# Altium PCB NEpic.PcbDoc (part 2 of 5)
Units mil, origin at the board's own origin, x right, y up, seen from the top; angles counter-clockwise.
Board outline 1660 x 1990 mil, 4 copper layers (Top Layer, GND, VCC, Bottom Layer); 30 components, 61 nets, 194 pads, 84 vias.
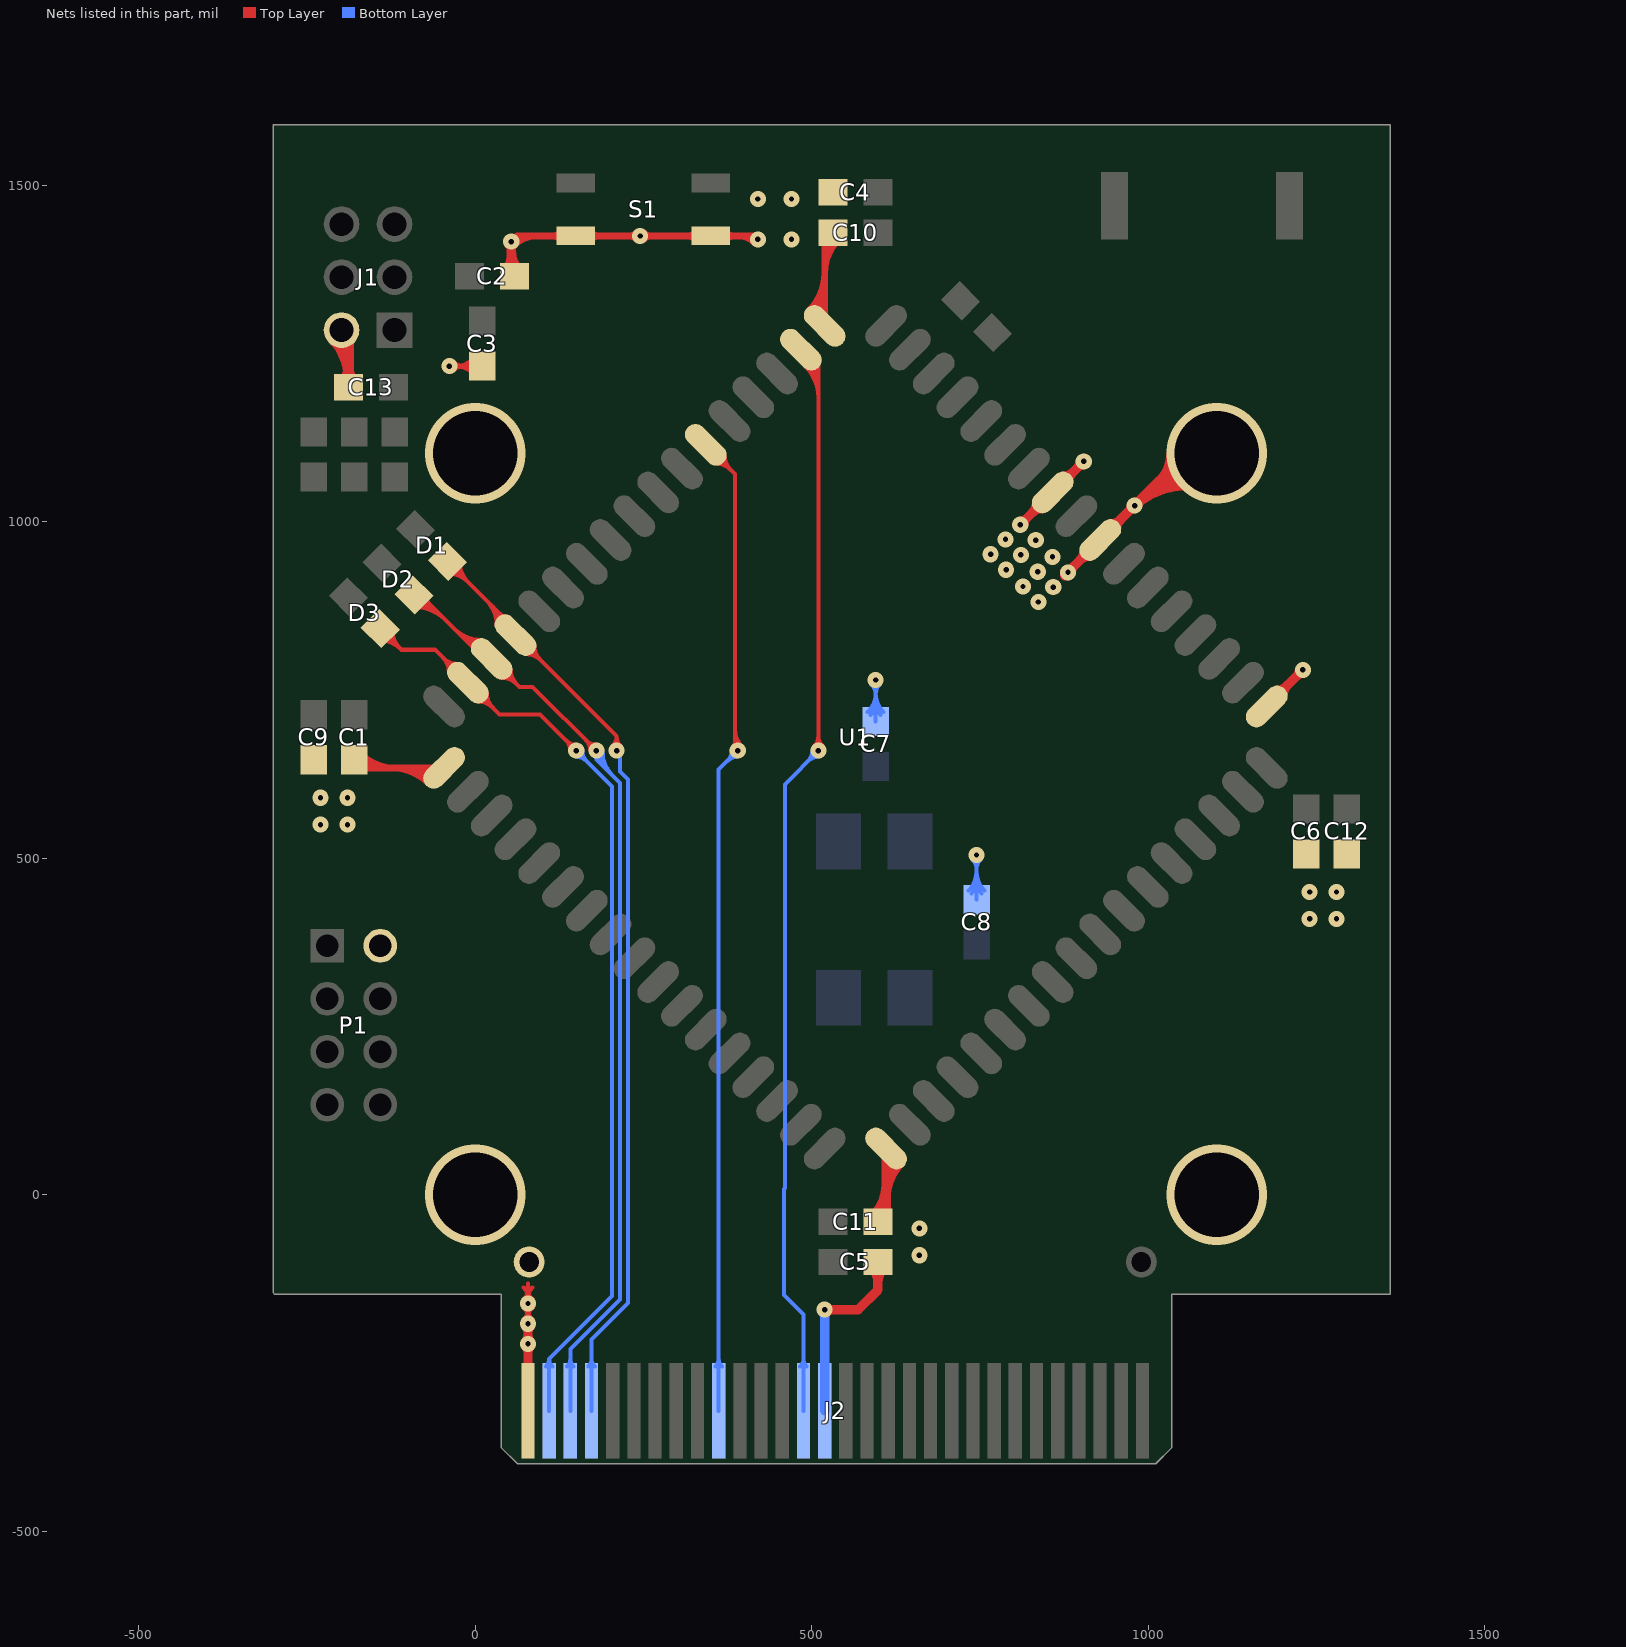
[diagram p4: the nets of this part, all layers, seen from the top]

## Via types
v1: diameter 24, hole 8, Top Layer to Bottom Layer, tented both sides, 78 vias
v2: diameter 150, hole 126, Top Layer to Bottom Layer, 4 vias
v3: diameter 40, hole 20, Top Layer to Bottom Layer, tented both sides, 2 vias

## Nets (pads, with @x,y where several pads share a name; then routed paths per layer and width w, separated by ;. In a path a pad name is that pad's centre, name@x,y a point inside that pad or via, vN(x,y) a via of type N, cw(c..) or ccw(c..) an arc to the next point about the centre after c; other vN are vias at no path point) (continued)
GND: C1.1 C2.1 C3.1 C4.1 C5.1 C6.1 C7.1 C8.1 C9.1 C10.1 C11.1 C12.1 C13.1 J1.2 J2.31 J2.60 P1.2 pad.0@80,-100 S1.1 S1.3 U1.1 U1.18 U1.35 U1.42 U1.44 U1.52 | length 10485.5
  Top Layer w6: v1(-38.46,1231.54) C3.1@10,1231.54 ; v1@51.34,1418.66 cw(c66.66,1403.34) 66.66,1425 ; v1(53.46,1416.54) v1@61.93,1425 ; v1@55.59,1414.41 cw(c81.14,1388.86) 81.14,1425 ; v1@59.83,1410.17 cw(c95.63,1374.37) 95.63,1425 ; 71.94,-138.06 cw(c56.58,-153.42) 78.31,-153.42 cw(c100.03,-153.42) 84.67,-138.06 ; v1(78.31,-191.69) v1(78.31,-161.69) 78.31,-131.69 ; S1.1@126.83,1417.38 ccw(c108.42,1398.98) 108.42,1425 ccw(c108.42,1451.02) S1.1@126.83,1432.62 ; S1.1@171.6,1417.38 cw(c190,1398.98) 190,1425 cw(c190,1451.02) S1.1@171.6,1432.62 ; v1@238.64,1418.64 ccw(c223.27,1403.27) 223.27,1425 ccw(c223.27,1446.73) v1@238.64,1431.36 ; v1@251.36,1418.64 cw(c266.73,1403.27) 266.73,1425 cw(c266.73,1446.73) v1@251.36,1431.36 ; S1.3@327.61,1417.38 ccw(c309.21,1398.98) 309.21,1425 ccw(c309.21,1451.02) S1.3@327.61,1432.62 ; S1.3@372.39,1417.38 cw(c390.79,1398.98) 390.79,1425 cw(c390.79,1451.02) S1.3@372.39,1432.62 ; 386.2,1425 cw(c386.2,1386.2) v1@413.64,1413.64 ; 400.69,1425 cw(c400.69,1400.69) v1@417.88,1417.88 ; U1.35@1176.34,725.66 U1.35@1176.34,726.34 ; v1@-32.1,1225.17 cw(c-16.74,1209.81) -16.74,1231.54 ; v1@-32.1,1225.17 cw(c-16.74,1209.81) -16.74,1231.54 ; v1@-32.1,1225.17 cw(c-16.74,1209.81) -16.74,1231.54 ; v1@-32.1,1237.9 ccw(c-16.74,1253.26) -16.74,1231.54 ; v1@-32.1,1237.9 ccw(c-16.74,1253.26) -16.74,1231.54 ; v1@-32.1,1237.9 ccw(c-16.74,1253.26) -16.74,1231.54 ; v1@-30.28,1231.54 cw(c-30.28,1191.25) C3.1@-1.8,1219.74 ; v1@-30.28,1231.54 ccw(c-30.28,1271.82) C3.1@-1.8,1243.33 ; v1@-30.28,1231.54 cw(c-30.28,1191.25) C3.1@-1.8,1219.74 ; v1@-30.28,1231.54 ccw(c-30.28,1271.82) C3.1@-1.8,1243.33 ; v1@-30.28,1231.54 ccw(c-30.28,1271.82) C3.1@-1.8,1243.33 ; v1@-30.28,1231.54 cw(c-30.28,1191.25) C3.1@-1.8,1219.74 ; -15.8,1231.54 cw(c-15.8,1205.74) C3.1@2.44,1223.98 ; -15.8,1231.54 ccw(c-15.8,1257.33) C3.1@2.44,1239.09 ; -15.8,1231.54 cw(c-15.8,1205.74) C3.1@2.44,1223.98 ; -15.8,1231.54 ccw(c-15.8,1257.33) C3.1@2.44,1239.09 ; -15.8,1231.54 ccw(c-15.8,1257.33) C3.1@2.44,1239.09 ; -15.8,1231.54 cw(c-15.8,1205.74) C3.1@2.44,1223.98 ; v1@71.94,-185.33 ccw(c56.58,-169.97) v1@78.31,-169.97 ; v1@71.94,-185.33 ccw(c56.58,-169.97) v1@78.31,-169.97 ; v1@71.94,-185.33 ccw(c56.58,-169.97) v1@78.31,-169.97 ; v1@71.94,-185.33 ccw(c56.58,-169.97) v1@78.31,-169.97 ; v1@71.94,-168.06 cw(c56.58,-183.42) v1@78.31,-183.42 ; v1@71.94,-168.06 cw(c56.58,-183.42) v1@78.31,-183.42 ; v1@71.94,-168.06 cw(c56.58,-183.42) v1@78.31,-183.42 ; v1@71.94,-168.06 cw(c56.58,-183.42) v1@78.31,-183.42 ; v1@71.94,-155.33 ccw(c56.58,-139.97) 78.31,-139.97 ; v1@71.94,-155.33 ccw(c56.58,-139.97) 78.31,-139.97 ; v1@71.94,-155.33 ccw(c56.58,-139.97) 78.31,-139.97 ; v1@71.94,-155.33 ccw(c56.58,-139.97) 78.31,-139.97 ; v1@78.31,-183.42 cw(c100.03,-183.42) v1@84.67,-168.06 ; v1@78.31,-183.42 cw(c100.03,-183.42) v1@84.67,-168.06 ; v1@78.31,-183.42 cw(c100.03,-183.42) v1@84.67,-168.06 ; v1@78.31,-183.42 cw(c100.03,-183.42) v1@84.67,-168.06 ; v1@78.31,-169.97 ccw(c100.03,-169.97) v1@84.67,-185.33 ; v1@78.31,-169.97 ccw(c100.03,-169.97) v1@84.67,-185.33 ; v1@78.31,-169.97 ccw(c100.03,-169.97) v1@84.67,-185.33 ; v1@78.31,-169.97 ccw(c100.03,-169.97) v1@84.67,-185.33 ; 78.31,-139.97 ccw(c100.03,-139.97) v1@84.67,-155.33 ; 78.31,-139.97 ccw(c100.03,-139.97) v1@84.67,-155.33 ; 78.31,-139.97 ccw(c100.03,-139.97) v1@84.67,-155.33 ; 78.31,-139.97 ccw(c100.03,-139.97) v1@84.67,-155.33
  Top Layer w10: C1.1@-167.81,634.34 U1.1@-46.34,634.34 ; v1@61.93,1425 S1.1@149.21,1425 v1(245,1425) S1.3@350,1425 v1@415,1425 ; U1.52@519.34,1291.34 C10.1@519.34,1417.81 ; C1.1@-176.69,647.88 ccw(c-144.01,680.56) -144.01,634.34 ; C1.1@-176.69,647.88 ccw(c-144.01,680.56) -144.01,634.34 ; C1.1@-176.69,647.88 ccw(c-144.01,680.56) -144.01,634.34 ; C1.1@-176.69,647.88 ccw(c-144.01,680.56) -144.01,634.34 ; C1.1@-169.62,654.95 ccw(c-119.87,704.7) -119.87,634.34 ; C1.1@-169.62,654.95 ccw(c-119.87,704.7) -119.87,634.34 ; C1.1@-169.62,654.95 ccw(c-119.87,704.7) -119.87,634.34 ; C1.1@-169.62,654.95 ccw(c-119.87,704.7) -119.87,634.34 ; -124.57,634.34 cw(c-124.57,556.12) U1.1@-69.25,611.43 ; -124.57,634.34 cw(c-124.57,556.12) U1.1@-69.25,611.43 ; -124.57,634.34 cw(c-124.57,556.12) U1.1@-69.25,611.43 ; -124.57,634.34 cw(c-124.57,556.12) U1.1@-69.25,611.43 ; -100.42,634.34 cw(c-100.42,580.26) U1.1@-62.18,618.5 ; -100.42,634.34 cw(c-100.42,580.26) U1.1@-62.18,618.5 ; -100.42,634.34 cw(c-100.42,580.26) U1.1@-62.18,618.5 ; -100.42,634.34 cw(c-100.42,580.26) U1.1@-62.18,618.5 ; -76.28,634.34 cw(c-76.28,604.4) U1.1@-55.11,625.57 ; -76.28,634.34 cw(c-76.28,604.4) U1.1@-55.11,625.57 ; -76.28,634.34 cw(c-76.28,604.4) U1.1@-55.11,625.57 ; -76.28,634.34 cw(c-76.28,604.4) U1.1@-55.11,625.57 ; U1.1@-52.14,634.34 cw(c-52.14,628.55) U1.1@-48.04,632.65 ; U1.1@-52.14,634.34 cw(c-52.14,628.55) U1.1@-48.04,632.65 ; U1.1@-52.14,634.34 cw(c-52.14,628.55) U1.1@-48.04,632.65 ; U1.1@-52.14,634.34 cw(c-52.14,628.55) U1.1@-48.04,632.65 ; v1@51.34,1418.66 cw(c66.66,1403.34) 66.66,1425 ; v1@51.34,1418.66 cw(c66.66,1403.34) 66.66,1425 ; v1@51.34,1418.66 cw(c66.66,1403.34) 66.66,1425 ; v1@58.41,1411.59 cw(c90.8,1379.2) 90.8,1425 ; v1@58.41,1411.59 cw(c90.8,1379.2) 90.8,1425 ; v1@58.41,1411.59 cw(c90.8,1379.2) 90.8,1425 ; 113.25,1425 cw(c113.25,1403.8) S1.1@128.24,1418.79 ; 113.25,1425 ccw(c113.25,1446.2) S1.1@128.24,1431.21 ; 113.25,1425 cw(c113.25,1403.8) S1.1@128.24,1418.79 ; 113.25,1425 ccw(c113.25,1446.2) S1.1@128.24,1431.21 ; 113.25,1425 ccw(c113.25,1446.2) S1.1@128.24,1431.21 ; 113.25,1425 cw(c113.25,1403.8) S1.1@128.24,1418.79 ; S1.1@170.18,1418.79 cw(c185.17,1403.8) 185.17,1425 ; S1.1@170.18,1418.79 cw(c185.17,1403.8) 185.17,1425 ; S1.1@170.18,1418.79 cw(c185.17,1403.8) 185.17,1425 ; S1.1@170.18,1431.21 ccw(c185.17,1446.2) 185.17,1425 ; S1.1@170.18,1431.21 ccw(c185.17,1446.2) 185.17,1425 ; S1.1@170.18,1431.21 ccw(c185.17,1446.2) 185.17,1425 ; 228.1,1425 cw(c228.1,1408.1) v1@240.05,1420.05 ; 228.1,1425 ccw(c228.1,1441.9) v1@240.05,1429.95 ; 228.1,1425 cw(c228.1,1408.1) v1@240.05,1420.05 ; 228.1,1425 ccw(c228.1,1441.9) v1@240.05,1429.95 ; 228.1,1425 ccw(c228.1,1441.9) v1@240.05,1429.95 ; 228.1,1425 cw(c228.1,1408.1) v1@240.05,1420.05 ; v1@249.95,1420.05 cw(c261.9,1408.1) 261.9,1425 ; v1@249.95,1420.05 cw(c261.9,1408.1) 261.9,1425 ; v1@249.95,1420.05 cw(c261.9,1408.1) 261.9,1425 ; v1@249.95,1429.95 ccw(c261.9,1441.9) 261.9,1425 ; v1@249.95,1429.95 ccw(c261.9,1441.9) 261.9,1425 ; v1@249.95,1429.95 ccw(c261.9,1441.9) 261.9,1425 ; 314.04,1425 cw(c314.04,1403.8) S1.3@329.03,1418.79 ; 314.04,1425 ccw(c314.04,1446.2) S1.3@329.03,1431.21 ; 314.04,1425 cw(c314.04,1403.8) S1.3@329.03,1418.79 ; 314.04,1425 ccw(c314.04,1446.2) S1.3@329.03,1431.21 ; 314.04,1425 ccw(c314.04,1446.2) S1.3@329.03,1431.21 ; 314.04,1425 cw(c314.04,1403.8) S1.3@329.03,1418.79 ; S1.3@370.97,1418.79 cw(c385.96,1403.8) 385.96,1425 ; S1.3@370.97,1418.79 cw(c385.96,1403.8) 385.96,1425 ; S1.3@370.97,1418.79 cw(c385.96,1403.8) 385.96,1425 ; S1.3@370.97,1431.21 ccw(c385.96,1446.2) 385.96,1425 ; S1.3@370.97,1431.21 ccw(c385.96,1446.2) 385.96,1425 ; S1.3@370.97,1431.21 ccw(c385.96,1446.2) 385.96,1425 ; 391.03,1425 cw(c391.03,1391.03) v1@415.05,1415.05 ; 391.03,1425 cw(c391.03,1391.03) v1@415.05,1415.05 ; 391.03,1425 cw(c391.03,1391.03) v1@415.05,1415.05 ; U1.52@496.43,1314.25 ccw(c441.12,1369.57) 519.34,1369.57 ; U1.52@496.43,1314.25 ccw(c441.12,1369.57) 519.34,1369.57 ; U1.52@496.43,1314.25 ccw(c441.12,1369.57) 519.34,1369.57 ; U1.52@496.43,1314.25 ccw(c441.12,1369.57) 519.34,1369.57 ; U1.52@503.5,1307.18 ccw(c465.26,1345.42) 519.34,1345.42 ; U1.52@503.5,1307.18 ccw(c465.26,1345.42) 519.34,1345.42 ; U1.52@503.5,1307.18 ccw(c465.26,1345.42) 519.34,1345.42 ; U1.52@503.5,1307.18 ccw(c465.26,1345.42) 519.34,1345.42 ; U1.52@510.57,1300.11 ccw(c489.4,1321.28) 519.34,1321.28 ; U1.52@510.57,1300.11 ccw(c489.4,1321.28) 519.34,1321.28 ; U1.52@510.57,1300.11 ccw(c489.4,1321.28) 519.34,1321.28 ; U1.52@510.57,1300.11 ccw(c489.4,1321.28) 519.34,1321.28 ; U1.52@517.65,1293.04 ccw(c513.55,1297.14) U1.52@519.34,1297.14 ; U1.52@517.65,1293.04 ccw(c513.55,1297.14) U1.52@519.34,1297.14 ; U1.52@517.65,1293.04 ccw(c513.55,1297.14) U1.52@519.34,1297.14 ; U1.52@517.65,1293.04 ccw(c513.55,1297.14) U1.52@519.34,1297.14 ; 519.34,1369.87 cw(c589.7,1369.87) C10.1@539.95,1419.62 ; 519.34,1369.87 cw(c589.7,1369.87) C10.1@539.95,1419.62 ; 519.34,1369.87 cw(c589.7,1369.87) C10.1@539.95,1419.62 ; 519.34,1369.87 cw(c589.7,1369.87) C10.1@539.95,1419.62 ; 519.34,1394.01 cw(c565.56,1394.01) C10.1@532.88,1426.69 ; 519.34,1394.01 cw(c565.56,1394.01) C10.1@532.88,1426.69 ; 519.34,1394.01 cw(c565.56,1394.01) C10.1@532.88,1426.69 ; 519.34,1394.01 cw(c565.56,1394.01) C10.1@532.88,1426.69
  Top Layer w14: C2.1@47.53,1373.97 ccw(c33.19,1388.31) 53.46,1388.31 ; C2.1@53.46,1365 v1(53.46,1416.54) ; 53.46,1402.94 ccw(c94.44,1402.94) C2.1@65.47,1373.97 ; J2.60@78.31,-321.26 v1(78.31,-221.69) v1(78.31,-191.69) ; v1(519.25,-170.75) 569.25,-170.75 598.46,-141.54 C5.1@598.46,-100 ; C11.1@610.66,-27.81 U1.18@610.66,68.66 ; v1(810,995.71) U1.44@858.14,1043.85 v1(904.29,1090) ; v1@875.71,920 U1.42@928.85,973.14 v1(980,1024.29) 1057.71,1102 v2(1102,1102) ; v1@886,925 cw(c898.77,925) 889.74,934.03 ; v1@975.06,1019.35 cw(c1058.06,936.34) v2@1088.16,1049.8 ; v1@980,1029.29 ccw(c980,1041.36) 988.54,1032.83 ccw(c997.07,1024.29) v1@985,1024.29 ; 992.25,1036.54 cw(c1065.27,963.53) v2@1091.75,1063.34 ; 1009.45,1053.74 cw(c1072.48,990.71) v2@1095.33,1076.87 ; 1017.23,1061.52 ccw(c976.76,1102) v2@1034,1102 ; 1026.65,1070.94 cw(c1079.69,1017.89) v2@1098.92,1090.4 ; U1.35@1176.34,726.34 v1(1230,780) ; C2.1@44.49,1373.97 ccw(c22.84,1395.62) 53.46,1395.62 ; C2.1@44.49,1373.97 ccw(c22.84,1395.62) 53.46,1395.62 ; C2.1@44.49,1373.97 ccw(c22.84,1395.62) 53.46,1395.62 ; v1@49.93,1413 cw(c41.39,1404.46) 53.46,1404.46 ; v1@49.93,1413 cw(c41.39,1404.46) 53.46,1404.46 ; v1@49.93,1413 cw(c41.39,1404.46) 53.46,1404.46 ; v1@49.93,1413 cw(c41.39,1404.46) 53.46,1404.46 ; 53.46,1395.62 ccw(c84.09,1395.62) C2.1@62.43,1373.97 ; 53.46,1395.62 ccw(c84.09,1395.62) C2.1@62.43,1373.97 ; 53.46,1395.62 ccw(c84.09,1395.62) C2.1@62.43,1373.97 ; 53.46,1404.46 cw(c65.54,1404.46) v1@57,1413 ; 53.46,1404.46 cw(c65.54,1404.46) v1@57,1413 ; 53.46,1404.46 cw(c65.54,1404.46) v1@57,1413 ; 53.46,1404.46 cw(c65.54,1404.46) v1@57,1413 ; v1@74.77,-225.23 cw(c66.24,-233.76) 78.31,-233.76 ; v1@74.77,-225.23 cw(c66.24,-233.76) 78.31,-233.76 ; v1@74.77,-225.23 cw(c66.24,-233.76) 78.31,-233.76 ; v1@74.77,-225.23 cw(c66.24,-233.76) 78.31,-233.76 ; v1@74.77,-218.16 ccw(c66.24,-209.62) 78.31,-209.62 ; v1@74.77,-218.16 ccw(c66.24,-209.62) 78.31,-209.62 ; v1@74.77,-218.16 ccw(c66.24,-209.62) 78.31,-209.62 ; v1@74.77,-218.16 ccw(c66.24,-209.62) 78.31,-209.62 ; v1@74.77,-195.23 cw(c66.24,-203.76) 78.31,-203.76 ; v1@74.77,-195.23 cw(c66.24,-203.76) 78.31,-203.76 ; v1@74.77,-195.23 cw(c66.24,-203.76) 78.31,-203.76 ; v1@74.77,-195.23 cw(c66.24,-203.76) 78.31,-203.76 ; 78.31,-233.76 cw(c90.38,-233.76) v1@81.84,-225.23 ; 78.31,-233.76 cw(c90.38,-233.76) v1@81.84,-225.23 ; 78.31,-233.76 cw(c90.38,-233.76) v1@81.84,-225.23 ; 78.31,-233.76 cw(c90.38,-233.76) v1@81.84,-225.23 ; 78.31,-209.62 ccw(c90.38,-209.62) v1@81.84,-218.16 ; 78.31,-209.62 ccw(c90.38,-209.62) v1@81.84,-218.16 ; 78.31,-209.62 ccw(c90.38,-209.62) v1@81.84,-218.16 ; 78.31,-209.62 ccw(c90.38,-209.62) v1@81.84,-218.16 ; 78.31,-203.76 cw(c90.38,-203.76) v1@81.84,-195.23 ; 78.31,-203.76 cw(c90.38,-203.76) v1@81.84,-195.23 ; 78.31,-203.76 cw(c90.38,-203.76) v1@81.84,-195.23 ; 78.31,-203.76 cw(c90.38,-203.76) v1@81.84,-195.23 ; v1@522.79,-174.28 cw(c531.32,-182.82) 531.32,-170.75 ; v1@522.79,-174.28 cw(c531.32,-182.82) 531.32,-170.75 ; v1@522.79,-174.28 cw(c531.32,-182.82) 531.32,-170.75 ; v1@522.79,-174.28 cw(c531.32,-182.82) 531.32,-170.75 ; v1@522.79,-167.21 ccw(c531.32,-158.68) 531.32,-170.75 ; v1@522.79,-167.21 ccw(c531.32,-158.68) 531.32,-170.75 ; v1@522.79,-167.21 ccw(c531.32,-158.68) 531.32,-170.75 ; v1@522.79,-167.21 ccw(c531.32,-158.68) 531.32,-170.75 ; C5.1@589.49,-108.97 cw(c567.84,-130.62) 598.46,-130.62 ; C5.1@589.49,-108.97 cw(c567.84,-130.62) 598.46,-130.62 ; C5.1@589.49,-108.97 cw(c567.84,-130.62) 598.46,-130.62 ; C5.1@589.49,-108.97 cw(c567.84,-130.62) 598.46,-130.62 ; C11.1@591.46,-31.03 ccw(c545.13,15.3) 610.66,15.3 ; C11.1@591.46,-31.03 ccw(c545.13,15.3) 610.66,15.3 ; C11.1@591.46,-31.03 ccw(c545.13,15.3) 610.66,15.3 ; C11.1@591.46,-31.03 ccw(c545.13,15.3) 610.66,15.3 ; 598.46,-130.62 cw(c629.09,-130.62) C5.1@607.43,-108.97 ; 598.46,-130.62 cw(c629.09,-130.62) C5.1@607.43,-108.97 ; 598.46,-130.62 cw(c629.09,-130.62) C5.1@607.43,-108.97 ; 598.46,-130.62 cw(c629.09,-130.62) C5.1@607.43,-108.97 ; C11.1@601.36,-40.93 ccw(c578.93,-18.49) 610.66,-18.49 ; C11.1@601.36,-40.93 ccw(c578.93,-18.49) 610.66,-18.49 ; C11.1@601.36,-40.93 ccw(c578.93,-18.49) 610.66,-18.49 ; C11.1@601.36,-40.93 ccw(c578.93,-18.49) 610.66,-18.49 ; 610.66,-4.74 cw(c684.05,-4.74) U1.18@632.15,47.16 ; 610.66,-4.74 cw(c684.05,-4.74) U1.18@632.15,47.16 ; 610.66,-4.74 cw(c684.05,-4.74) U1.18@632.15,47.16 ; 610.66,-4.74 cw(c684.05,-4.74) U1.18@632.15,47.16 ; 610.66,29.06 cw(c650.25,29.06) U1.18@622.25,57.06 ; 610.66,29.06 cw(c650.25,29.06) U1.18@622.25,57.06 ; 610.66,29.06 cw(c650.25,29.06) U1.18@622.25,57.06 ; 610.66,29.06 cw(c650.25,29.06) U1.18@622.25,57.06 ; U1.18@610.66,62.86 cw(c616.45,62.86) U1.18@612.35,66.96 ; U1.18@610.66,62.86 cw(c616.45,62.86) U1.18@612.35,66.96 ; U1.18@610.66,62.86 cw(c616.45,62.86) U1.18@612.35,66.96 ; U1.18@610.66,62.86 cw(c616.45,62.86) U1.18@612.35,66.96 ; v1@810,1000.71 ccw(c810,1012.78) 818.54,1004.25 ; v1@810,1000.71 ccw(c810,1012.78) 818.54,1004.25 ; v1@810,1000.71 ccw(c810,1012.78) 818.54,1004.25 ; v1@810,1000.71 ccw(c810,1012.78) 818.54,1004.25 ; v1@815,995.71 cw(c827.07,995.71) 818.54,1004.25 ; v1@815,995.71 cw(c827.07,995.71) 818.54,1004.25 ; v1@815,995.71 cw(c827.07,995.71) 818.54,1004.25 ; v1@815,995.71 cw(c827.07,995.71) 818.54,1004.25 ; 827.9,1013.61 cw(c842.83,998.68) U1.44@842.83,1019.79 ; 827.9,1013.61 ccw(c812.97,1028.54) U1.44@834.08,1028.54 ; 827.9,1013.61 cw(c842.83,998.68) U1.44@842.83,1019.79 ; 827.9,1013.61 ccw(c812.97,1028.54) U1.44@834.08,1028.54 ; 827.9,1013.61 ccw(c812.97,1028.54) U1.44@834.08,1028.54 ; 827.9,1013.61 cw(c842.83,998.68) U1.44@842.83,1019.79 ; 827.9,1013.61 ccw(c812.97,1028.54) U1.44@834.08,1028.54 ; 827.9,1013.61 cw(c842.83,998.68) U1.44@842.83,1019.79 ; U1.44@873.46,1067.91 ccw(c873.46,1089.03) 888.39,1074.1 ; U1.44@873.46,1067.91 ccw(c873.46,1089.03) 888.39,1074.1 ; U1.44@873.46,1067.91 ccw(c873.46,1089.03) 888.39,1074.1 ; U1.44@873.46,1067.91 ccw(c873.46,1089.03) 888.39,1074.1 ; v1@875.71,925 ccw(c875.71,937.07) v1@884.25,928.54 ; v1@875.71,925 ccw(c875.71,937.07) v1@884.25,928.54 ; v1@875.71,925 ccw(c875.71,937.07) v1@884.25,928.54 ; v1@880.71,920 cw(c892.78,920) v1@884.25,928.54 ; v1@880.71,920 cw(c892.78,920) v1@884.25,928.54 ; v1@880.71,920 cw(c892.78,920) v1@884.25,928.54 ; U1.44@882.2,1059.17 cw(c903.32,1059.17) 888.39,1074.1 ; U1.44@882.2,1059.17 cw(c903.32,1059.17) 888.39,1074.1 ; U1.44@882.2,1059.17 cw(c903.32,1059.17) 888.39,1074.1 ; U1.44@882.2,1059.17 cw(c903.32,1059.17) 888.39,1074.1 ; 895.75,1081.46 cw(c904.29,1072.93) v1@904.29,1085 ; 895.75,1081.46 ccw(c887.22,1090) v1@899.29,1090 ; 895.75,1081.46 cw(c904.29,1072.93) v1@904.29,1085 ; 895.75,1081.46 ccw(c887.22,1090) v1@899.29,1090 ; 895.75,1081.46 cw(c904.29,1072.93) v1@904.29,1085 ; 895.75,1081.46 ccw(c887.22,1090) v1@899.29,1090 ; 895.75,1081.46 ccw(c887.22,1090) v1@899.29,1090 ; 895.75,1081.46 cw(c904.29,1072.93) v1@904.29,1085 ; 898.61,942.9 cw(c913.54,927.97) U1.42@913.54,949.08 ; 898.61,942.9 ccw(c883.68,957.83) U1.42@904.79,957.83 ; 898.61,942.9 cw(c913.54,927.97) U1.42@913.54,949.08 ; 898.61,942.9 ccw(c883.68,957.83) U1.42@904.79,957.83 ; 898.61,942.9 ccw(c883.68,957.83) U1.42@904.79,957.83 ; 898.61,942.9 cw(c913.54,927.97) U1.42@913.54,949.08 ; 898.61,942.9 ccw(c883.68,957.83) U1.42@904.79,957.83 ; 898.61,942.9 cw(c913.54,927.97) U1.42@913.54,949.08 ; U1.42@944.17,997.2 ccw(c944.17,1018.32) 959.1,1003.39 ; U1.42@944.17,997.2 ccw(c944.17,1018.32) 959.1,1003.39 ; U1.42@944.17,997.2 ccw(c944.17,1018.32) 959.1,1003.39 ; U1.42@944.17,997.2 ccw(c944.17,1018.32) 959.1,1003.39 ; U1.42@952.91,988.46 cw(c974.03,988.46) 959.1,1003.39 ; U1.42@952.91,988.46 cw(c974.03,988.46) 959.1,1003.39 ; U1.42@952.91,988.46 cw(c974.03,988.46) 959.1,1003.39 ; U1.42@952.91,988.46 cw(c974.03,988.46) 959.1,1003.39 ; 971.46,1015.75 cw(c980,1007.22) v1@980,1019.29 ; 971.46,1015.75 ccw(c962.93,1024.29) v1@975,1024.29 ; 971.46,1015.75 cw(c980,1007.22) v1@980,1019.29 ; 971.46,1015.75 ccw(c962.93,1024.29) v1@975,1024.29 ; 971.46,1015.75 cw(c980,1007.22) v1@980,1019.29 ; 971.46,1015.75 ccw(c962.93,1024.29) v1@975,1024.29 ; 971.46,1015.75 ccw(c962.93,1024.29) v1@975,1024.29 ; 971.46,1015.75 cw(c980,1007.22) v1@980,1019.29 ; U1.35@1191.65,749.72 ccw(c1191.65,769.18) 1205.42,755.42 ; U1.35@1191.65,749.72 ccw(c1191.65,769.18) 1205.42,755.42 ; U1.35@1191.65,749.72 ccw(c1191.65,769.18) 1205.42,755.42 ; U1.35@1191.65,749.72 ccw(c1191.65,769.18) 1205.42,755.42 ; U1.35@1200.4,740.97 cw(c1223.18,740.97) 1207.07,757.07 ; U1.35@1200.4,740.97 cw(c1223.18,740.97) 1207.07,757.07 ; U1.35@1200.4,740.97 cw(c1223.18,740.97) 1207.07,757.07 ; U1.35@1200.4,740.97 cw(c1223.18,740.97) 1207.07,757.07 ; 1221.46,771.46 cw(c1230,762.93) v1@1230,775 ; 1221.46,771.46 ccw(c1212.93,780) v1@1225,780 ; 1221.46,771.46 cw(c1230,762.93) v1@1230,775 ; 1221.46,771.46 ccw(c1212.93,780) v1@1225,780 ; 1221.46,771.46 cw(c1230,762.93) v1@1230,775 ; 1221.46,771.46 ccw(c1212.93,780) v1@1225,780 ; 1221.46,771.46 ccw(c1212.93,780) v1@1225,780 ; 1221.46,771.46 cw(c1230,762.93) v1@1230,775
  Top Layer w16: C13.1@-188.46,1200 J1.2@-188.46,1274.72 ; J1.2@-211.82,1271.92 cw(c-268.21,1215.53) C13.1@-188.46,1215.53 ; J1.2@-211.82,1271.92 cw(c-268.21,1215.53) C13.1@-188.46,1215.53 ; J1.2@-211.82,1271.92 cw(c-268.21,1215.53) C13.1@-188.46,1215.53 ; J1.2@-211.82,1271.92 cw(c-268.21,1215.53) C13.1@-188.46,1215.53 ; J1.2@-200.51,1283.23 cw(c-229.58,1254.16) -188.46,1254.16 ; J1.2@-200.51,1283.23 cw(c-229.58,1254.16) -188.46,1254.16 ; J1.2@-200.51,1283.23 cw(c-229.58,1254.16) -188.46,1254.16 ; J1.2@-200.51,1283.23 cw(c-229.58,1254.16) -188.46,1254.16 ; C13.1@-196.73,1208.26 ccw(c-216.67,1228.21) -188.46,1228.21 ; C13.1@-196.73,1208.26 ccw(c-216.67,1228.21) -188.46,1228.21 ; C13.1@-196.73,1208.26 ccw(c-216.67,1228.21) -188.46,1228.21 ; C13.1@-196.73,1208.26 ccw(c-216.67,1228.21) -188.46,1228.21 ; -188.46,1228.21 ccw(c-160.25,1228.21) C13.1@-180.2,1208.26 ; -188.46,1228.21 ccw(c-160.25,1228.21) C13.1@-180.2,1208.26 ; -188.46,1228.21 ccw(c-160.25,1228.21) C13.1@-180.2,1208.26 ; -188.46,1228.21 ccw(c-160.25,1228.21) C13.1@-180.2,1208.26
  Bottom Layer w6: C7.1@595,703.46 v1(595,765) ; C8.1@745,438.46 v1(745,505) ; C7.1@583.2,717.23 ccw(c554.72,745.71) 595,745.71 ; C7.1@583.2,717.23 ccw(c554.72,745.71) 595,745.71 ; C7.1@583.2,717.23 ccw(c554.72,745.71) 595,745.71 ; C7.1@583.2,717.23 ccw(c554.72,745.71) 595,745.71 ; C7.1@587.44,712.99 ccw(c569.2,731.23) 595,731.23 ; C7.1@587.44,712.99 ccw(c569.2,731.23) 595,731.23 ; C7.1@587.44,712.99 ccw(c569.2,731.23) 595,731.23 ; C7.1@587.44,712.99 ccw(c569.2,731.23) 595,731.23 ; v1@588.64,758.64 cw(c573.27,743.27) 595,743.27 ; v1@588.64,758.64 cw(c573.27,743.27) 595,743.27 ; v1@588.64,758.64 cw(c573.27,743.27) 595,743.27 ; v1@588.64,758.64 cw(c573.27,743.27) 595,743.27 ; 595,731.23 ccw(c620.8,731.23) C7.1@602.56,712.99 ; 595,731.23 ccw(c620.8,731.23) C7.1@602.56,712.99 ; 595,731.23 ccw(c620.8,731.23) C7.1@602.56,712.99 ; 595,731.23 ccw(c620.8,731.23) C7.1@602.56,712.99 ; 595,743.27 cw(c616.73,743.27) v1@601.36,758.64 ; 595,743.27 cw(c616.73,743.27) v1@601.36,758.64 ; 595,743.27 cw(c616.73,743.27) v1@601.36,758.64 ; 595,743.27 cw(c616.73,743.27) v1@601.36,758.64 ; 595,745.71 ccw(c635.28,745.71) C7.1@606.8,717.23 ; 595,745.71 ccw(c635.28,745.71) C7.1@606.8,717.23 ; 595,745.71 ccw(c635.28,745.71) C7.1@606.8,717.23 ; 595,745.71 ccw(c635.28,745.71) C7.1@606.8,717.23 ; C8.1@733.2,452.23 ccw(c704.72,480.71) 745,480.71 ; C8.1@733.2,452.23 ccw(c704.72,480.71) 745,480.71 ; C8.1@733.2,452.23 ccw(c704.72,480.71) 745,480.71 ; C8.1@733.2,452.23 ccw(c704.72,480.71) 745,480.71 ; C8.1@737.44,447.99 ccw(c719.2,466.23) 745,466.23 ; C8.1@737.44,447.99 ccw(c719.2,466.23) 745,466.23 ; C8.1@737.44,447.99 ccw(c719.2,466.23) 745,466.23 ; C8.1@737.44,447.99 ccw(c719.2,466.23) 745,466.23 ; v1@738.64,498.64 cw(c723.27,483.27) 745,483.27 ; v1@738.64,498.64 cw(c723.27,483.27) 745,483.27 ; v1@738.64,498.64 cw(c723.27,483.27) 745,483.27 ; v1@738.64,498.64 cw(c723.27,483.27) 745,483.27 ; 745,466.23 ccw(c770.8,466.23) C8.1@752.56,447.99 ; 745,466.23 ccw(c770.8,466.23) C8.1@752.56,447.99 ; 745,466.23 ccw(c770.8,466.23) C8.1@752.56,447.99 ; 745,466.23 ccw(c770.8,466.23) C8.1@752.56,447.99 ; 745,480.71 ccw(c785.28,480.71) C8.1@756.8,452.23 ; 745,480.71 ccw(c785.28,480.71) C8.1@756.8,452.23 ; 745,480.71 ccw(c785.28,480.71) C8.1@756.8,452.23 ; 745,480.71 ccw(c785.28,480.71) C8.1@756.8,452.23 ; 745,483.27 cw(c766.73,483.27) v1@751.36,498.64 ; 745,483.27 cw(c766.73,483.27) v1@751.36,498.64 ; 745,483.27 cw(c766.73,483.27) v1@751.36,498.64 ; 745,483.27 cw(c766.73,483.27) v1@751.36,498.64
  Bottom Layer w14: J2.31@519.25,-321.26 v1(519.25,-170.75) ; v1@515.72,-174.28 cw(c507.18,-182.82) 519.25,-182.82 ; v1@515.72,-174.28 cw(c507.18,-182.82) 519.25,-182.82 ; v1@515.72,-174.28 cw(c507.18,-182.82) 519.25,-182.82 ; v1@515.72,-174.28 cw(c507.18,-182.82) 519.25,-182.82 ; 519.25,-182.82 cw(c531.32,-182.82) v1@522.79,-174.28 ; 519.25,-182.82 cw(c531.32,-182.82) v1@522.79,-174.28 ; 519.25,-182.82 cw(c531.32,-182.82) v1@522.79,-174.28 ; 519.25,-182.82 cw(c531.32,-182.82) v1@522.79,-174.28
  other v1: 660,-90 660,-50 1240,410 1280,410 1240,450 1280,450 -230,550 -190,550 -230,590 -190,590 837,881 859,903 814,904 881,925 836,926 789,929 858,948 811,951 766,952 833,973 788,974 420,1420 470,1420 420,1480 470,1480
  other v2: 0,0 1102,0 0,1102
I2C0/SPI0: J2.33 U1.53 | length 2570.6
  Top Layer w6: U1.53@483.99,1255.99 510,1229.98 510,1110 v1(510,660) ; U1.53@490.29,1231.66 cw(c442.7,1184.07) 510,1184.07 ; U1.53@490.29,1231.66 cw(c442.7,1184.07) 510,1184.07 ; U1.53@490.29,1231.66 cw(c442.7,1184.07) 510,1184.07 ; U1.53@490.29,1231.66 cw(c442.7,1184.07) 510,1184.07 ; U1.53@494.53,1235.9 cw(c457.18,1198.55) 510,1198.55 ; U1.53@494.53,1235.9 cw(c457.18,1198.55) 510,1198.55 ; U1.53@494.53,1235.9 cw(c457.18,1198.55) 510,1198.55 ; U1.53@494.53,1235.9 cw(c457.18,1198.55) 510,1198.55 ; U1.53@498.77,1240.15 cw(c471.67,1213.04) 510,1213.04 ; U1.53@498.77,1240.15 cw(c471.67,1213.04) 510,1213.04 ; U1.53@498.77,1240.15 cw(c471.67,1213.04) 510,1213.04 ; U1.53@498.77,1240.15 cw(c471.67,1213.04) 510,1213.04 ; U1.53@503.02,1244.39 cw(c486.15,1227.53) 510,1227.53 ; U1.53@503.02,1244.39 cw(c486.15,1227.53) 510,1227.53 ; U1.53@503.02,1244.39 cw(c486.15,1227.53) 510,1227.53 ; U1.53@503.02,1244.39 cw(c486.15,1227.53) 510,1227.53 ; v1@503.64,666.36 ccw(c488.27,681.73) 510,681.73 ; v1@503.64,666.36 ccw(c488.27,681.73) 510,681.73 ; v1@503.64,666.36 ccw(c488.27,681.73) 510,681.73 ; v1@503.64,666.36 ccw(c488.27,681.73) 510,681.73 ; 510,681.73 ccw(c531.73,681.73) v1@516.36,666.36 ; 510,681.73 ccw(c531.73,681.73) v1@516.36,666.36 ; 510,681.73 ccw(c531.73,681.73) v1@516.36,666.36 ; 510,681.73 ccw(c531.73,681.73) v1@516.36,666.36
  Bottom Layer w6: J2.33@487.76,-321.26 487.76,-177.76 459,-149 459,8.7 460,9.7 460,610 v1(510,660) ; J2.33@482.92,-255.4 ccw(c471.24,-243.72) 487.76,-243.72 ; J2.33@482.92,-255.4 ccw(c471.24,-243.72) 487.76,-243.72 ; J2.33@482.92,-255.4 ccw(c471.24,-243.72) 487.76,-243.72 ; J2.33@482.92,-255.4 ccw(c471.24,-243.72) 487.76,-243.72 ; 487.76,-243.72 ccw(c504.28,-243.72) J2.33@492.59,-255.4 ; 487.76,-243.72 ccw(c504.28,-243.72) J2.33@492.59,-255.4 ; 487.76,-243.72 ccw(c504.28,-243.72) J2.33@492.59,-255.4 ; 487.76,-243.72 ccw(c504.28,-243.72) J2.33@492.59,-255.4 ; 494.64,644.64 cw(c510,629.27) v1@510,651 ; 494.64,644.64 ccw(c479.27,660) v1@501,660 ; 494.64,644.64 cw(c510,629.27) v1@510,651 ; 494.64,644.64 ccw(c479.27,660) v1@501,660 ; 494.64,644.64 ccw(c479.27,660) v1@501,660 ; 494.64,644.64 cw(c510,629.27) v1@510,651 ; 494.64,644.64 ccw(c479.27,660) v1@501,660 ; 494.64,644.64 cw(c510,629.27) v1@510,651
LED1: D1.2 J2.53 U1.65 | length 2716.1
  Top Layer w6: D1.2@-41.34,941.34 U1.65@59.72,840.28 ; U1.65@59.72,831.72 210,681.45 ; v1(210,660) 210,681.45 ; D1.2@-39.95,923.26 cw(c-39.95,882.98) -11.46,911.46 ; D1.2@-39.95,923.26 cw(c-39.95,882.98) -11.46,911.46 ; D1.2@-39.95,923.26 cw(c-39.95,882.98) -11.46,911.46 ; D1.2@-39.95,923.26 cw(c-39.95,882.98) -11.46,911.46 ; D1.2@-39.95,929.26 cw(c-39.95,903.46) -21.7,921.7 ; D1.2@-39.95,929.26 cw(c-39.95,903.46) -21.7,921.7 ; D1.2@-39.95,929.26 cw(c-39.95,903.46) -21.7,921.7 ; D1.2@-39.95,929.26 cw(c-39.95,903.46) -21.7,921.7 ; D1.2@-29.26,939.95 ccw(c-3.46,939.95) -21.7,921.7 ; D1.2@-29.26,939.95 ccw(c-3.46,939.95) -21.7,921.7 ; D1.2@-29.26,939.95 ccw(c-3.46,939.95) -21.7,921.7 ; D1.2@-29.26,939.95 ccw(c-3.46,939.95) -21.7,921.7 ; D1.2@-23.26,939.95 ccw(c17.02,939.95) -11.46,911.46 ; D1.2@-23.26,939.95 ccw(c17.02,939.95) -11.46,911.46 ; D1.2@-23.26,939.95 ccw(c17.02,939.95) -11.46,911.46 ; D1.2@-23.26,939.95 ccw(c17.02,939.95) -11.46,911.46 ; 16.6,883.4 cw(c-19.76,847.03) U1.65@31.66,847.03 ; 16.6,883.4 cw(c-19.76,847.03) U1.65@31.66,847.03 ; 16.6,883.4 cw(c-19.76,847.03) U1.65@31.66,847.03 ; 16.6,883.4 cw(c-19.76,847.03) U1.65@31.66,847.03 ; 26.84,873.16 cw(c0.72,847.03) U1.65@37.66,847.03 ; 26.84,873.16 cw(c0.72,847.03) U1.65@37.66,847.03 ; 26.84,873.16 cw(c0.72,847.03) U1.65@37.66,847.03 ; 26.84,873.16 cw(c0.72,847.03) U1.65@37.66,847.03 ; 37.09,862.91 cw(c21.21,847.03) U1.65@43.66,847.03 ; 37.09,862.91 cw(c21.21,847.03) U1.65@43.66,847.03 ; 37.09,862.91 cw(c21.21,847.03) U1.65@43.66,847.03 ; 37.09,862.91 cw(c21.21,847.03) U1.65@43.66,847.03 ; 37.25,862.75 ccw(c44.41,869.91) U1.65@44.41,859.78 ; 37.25,862.75 ccw(c44.41,869.91) U1.65@44.41,859.78 ; 37.25,862.75 ccw(c44.41,869.91) U1.65@44.41,859.78 ; 37.25,862.75 ccw(c44.41,869.91) U1.65@44.41,859.78 ; U1.65@75.04,803.66 cw(c75.04,772.89) 96.8,794.65 ; U1.65@75.04,803.66 cw(c75.04,772.89) 96.8,794.65 ; U1.65@75.04,803.66 cw(c75.04,772.89) 96.8,794.65 ; U1.65@75.04,803.66 cw(c75.04,772.89) 96.8,794.65 ; U1.65@75.04,809.66 cw(c75.04,793.37) 86.55,804.89 ; U1.65@75.04,809.66 cw(c75.04,793.37) 86.55,804.89 ; U1.65@75.04,809.66 cw(c75.04,793.37) 86.55,804.89 ; U1.65@75.04,809.66 cw(c75.04,793.37) 86.55,804.89 ; U1.65@81.78,816.41 ccw(c98.07,816.41) 86.55,804.89 ; U1.65@81.78,816.41 ccw(c98.07,816.41) 86.55,804.89 ; U1.65@81.78,816.41 ccw(c98.07,816.41) 86.55,804.89 ; U1.65@81.78,816.41 ccw(c98.07,816.41) 86.55,804.89 ; U1.65@87.78,816.41 ccw(c118.56,816.41) 96.8,794.65 ; U1.65@87.78,816.41 ccw(c118.56,816.41) 96.8,794.65 ; U1.65@87.78,816.41 ccw(c118.56,816.41) 96.8,794.65 ; U1.65@87.78,816.41 ccw(c118.56,816.41) 96.8,794.65 ; v1@203.7,666.42 ccw(c188.95,681.44) 210,681.44 ; v1@203.7,666.42 ccw(c188.95,681.44) 210,681.44 ; v1@203.7,666.42 ccw(c188.95,681.44) 210,681.44 ; v1@203.7,666.42 ccw(c188.95,681.44) 210,681.44 ; 210,681.44 ccw(c231.05,681.44) v1@216.3,666.42 ; 210,681.44 ccw(c231.05,681.44) v1@216.3,666.42 ; 210,681.44 ccw(c231.05,681.44) v1@216.3,666.42 ; 210,681.44 ccw(c231.05,681.44) v1@216.3,666.42
  Bottom Layer w6: J2.53@172.8,-321.26 172.8,-214.95 227,-160.74 227,616.94 215,628.94 215,655 v1(210,660) ; J2.53@167.96,-255.4 ccw(c156.28,-243.72) 172.8,-243.72 ; J2.53@167.96,-255.4 ccw(c156.28,-243.72) 172.8,-243.72 ; J2.53@167.96,-255.4 ccw(c156.28,-243.72) 172.8,-243.72 ; J2.53@167.96,-255.4 ccw(c156.28,-243.72) 172.8,-243.72 ; 172.8,-243.72 ccw(c189.31,-243.72) J2.53@177.63,-255.4 ; 172.8,-243.72 ccw(c189.31,-243.72) J2.53@177.63,-255.4 ; 172.8,-243.72 ccw(c189.31,-243.72) J2.53@177.63,-255.4 ; 172.8,-243.72 ccw(c189.31,-243.72) J2.53@177.63,-255.4
LED2: D2.2 J2.55 U1.66 | length 3213.4
  Top Layer w6: D2.2@-91.34,891.34 -81.34,891.34 8.93,801.07 19.67,801.07 U1.66@24.37,796.37 66,754.74 85.26,754.74 v1(180,660) ; D2.2@-89.95,873.26 cw(c-89.95,808.84) -44.39,854.39 ; D2.2@-89.95,873.26 cw(c-89.95,808.84) -44.39,854.39 ; D2.2@-89.95,873.26 cw(c-89.95,808.84) -44.39,854.39 ; D2.2@-89.95,873.26 cw(c-89.95,808.84) -44.39,854.39 ; D2.2@-89.95,879.26 cw(c-89.95,829.32) -54.63,864.63 ; D2.2@-89.95,879.26 cw(c-89.95,829.32) -54.63,864.63 ; D2.2@-89.95,879.26 cw(c-89.95,829.32) -54.63,864.63 ; D2.2@-89.95,879.26 cw(c-89.95,829.32) -54.63,864.63 ; D2.2@-89.95,885.26 cw(c-89.95,849.81) -64.88,874.88 ; D2.2@-89.95,885.26 cw(c-89.95,849.81) -64.88,874.88 ; D2.2@-89.95,885.26 cw(c-89.95,849.81) -64.88,874.88 ; D2.2@-89.95,885.26 cw(c-89.95,849.81) -64.88,874.88 ; D2.2@-73.26,889.95 ccw(c-57.12,889.95) -68.53,878.53 ; D2.2@-73.26,889.95 ccw(c-57.12,889.95) -68.53,878.53 ; D2.2@-73.26,889.95 ccw(c-57.12,889.95) -68.53,878.53 ; D2.2@-73.26,889.95 ccw(c-57.12,889.95) -68.53,878.53 ; -31.03,841.03 ccw(c9.06,881.12) U1.66@9.06,824.43 ; -31.03,841.03 ccw(c9.06,881.12) U1.66@9.06,824.43 ; -31.03,841.03 ccw(c9.06,881.12) U1.66@9.06,824.43 ; -31.03,841.03 ccw(c9.06,881.12) U1.66@9.06,824.43 ; -20.79,830.79 ccw(c9.06,860.64) U1.66@9.06,818.43 ; -20.79,830.79 ccw(c9.06,860.64) U1.66@9.06,818.43 ; -20.79,830.79 ccw(c9.06,860.64) U1.66@9.06,818.43 ; -20.79,830.79 ccw(c9.06,860.64) U1.66@9.06,818.43 ; -10.55,820.55 ccw(c9.06,840.15) U1.66@9.06,812.43 ; -10.55,820.55 ccw(c9.06,840.15) U1.66@9.06,812.43 ; -10.55,820.55 ccw(c9.06,840.15) U1.66@9.06,812.43 ; -10.55,820.55 ccw(c9.06,840.15) U1.66@9.06,812.43 ; U1.66@39.68,768.31 cw(c39.68,737.53) 61.44,759.29 ; U1.66@39.68,768.31 cw(c39.68,737.53) 61.44,759.29 ; U1.66@39.68,768.31 cw(c39.68,737.53) 61.44,759.29 ; U1.66@39.68,768.31 cw(c39.68,737.53) 61.44,759.29 ; U1.66@39.68,774.31 cw(c39.68,758.02) 51.2,769.54 ; U1.66@39.68,774.31 cw(c39.68,758.02) 51.2,769.54 ; U1.66@39.68,774.31 cw(c39.68,758.02) 51.2,769.54 ; U1.66@39.68,774.31 cw(c39.68,758.02) 51.2,769.54 ; U1.66@46.43,781.05 ccw(c62.72,781.05) 51.2,769.54 ; U1.66@46.43,781.05 ccw(c62.72,781.05) 51.2,769.54 ; U1.66@46.43,781.05 ccw(c62.72,781.05) 51.2,769.54 ; U1.66@46.43,781.05 ccw(c62.72,781.05) 51.2,769.54 ; U1.66@52.43,781.05 ccw(c83.21,781.05) 61.44,759.29 ; U1.66@52.43,781.05 ccw(c83.21,781.05) 61.44,759.29 ; U1.66@52.43,781.05 ccw(c83.21,781.05) 61.44,759.29 ; U1.66@52.43,781.05 ccw(c83.21,781.05) 61.44,759.29 ; 164.64,675.36 cw(c149.27,660) v1@171,660 ; 164.64,675.36 ccw(c180,690.73) v1@180,669 ; 164.64,675.36 cw(c149.27,660) v1@171,660 ; 164.64,675.36 ccw(c180,690.73) v1@180,669 ; 164.64,675.36 ccw(c180,690.73) v1@180,669 ; 164.64,675.36 cw(c149.27,660) v1@171,660 ; 164.64,675.36 ccw(c180,690.73) v1@180,669 ; 164.64,675.36 cw(c149.27,660) v1@171,660
  Bottom Layer w6: J2.55@141.3,-321.26 141.3,-229.47 215,-155.77 215,611.97 180,646.97 v1(180,660) ; J2.55@136.46,-255.4 ccw(c124.78,-243.72) 141.3,-243.72 ; J2.55@136.46,-255.4 ccw(c124.78,-243.72) 141.3,-243.72 ; J2.55@136.46,-255.4 ccw(c124.78,-243.72) 141.3,-243.72 ; J2.55@136.46,-255.4 ccw(c124.78,-243.72) 141.3,-243.72 ; 141.3,-243.72 ccw(c157.82,-243.72) J2.55@146.14,-255.4 ; 141.3,-243.72 ccw(c157.82,-243.72) J2.55@146.14,-255.4 ; 141.3,-243.72 ccw(c157.82,-243.72) J2.55@146.14,-255.4 ; 141.3,-243.72 ccw(c157.82,-243.72) J2.55@146.14,-255.4 ; v1@177,660 ccw(c201.21,660) 184.09,642.88 ; v1@177,660 ccw(c201.21,660) 184.09,642.88 ; v1@177,660 ccw(c201.21,660) 184.09,642.88 ; v1@177,660 ccw(c201.21,660) 184.09,642.88 ; v1@183,660 ccw(c221.7,660) 194.33,632.64 ; v1@183,660 ccw(c221.7,660) 194.33,632.64 ; v1@183,660 ccw(c221.7,660) 194.33,632.64 ; v1@183,660 ccw(c221.7,660) 194.33,632.64 ; v1@189,660 ccw(c242.18,660) 204.58,622.39 ; v1@189,660 ccw(c242.18,660) 204.58,622.39 ; v1@189,660 ccw(c242.18,660) 204.58,622.39 ; v1@189,660 ccw(c242.18,660) 204.58,622.39
LED3: D3.2 J2.57 U1.67 | length 2789
  Top Layer w6: D3.2@-141.34,841.34 -110,810 -59.98,810 U1.67@-10.99,761.01 36,714.02 95.98,714.02 v1(150,660) ; D3.2@-139.95,823.26 cw(c-139.95,782.98) -111.46,811.46 ; D3.2@-139.95,823.26 cw(c-139.95,782.98) -111.46,811.46 ; D3.2@-139.95,823.26 cw(c-139.95,782.98) -111.46,811.46 ; D3.2@-139.95,823.26 cw(c-139.95,782.98) -111.46,811.46 ; D3.2@-139.95,829.26 cw(c-139.95,803.46) -121.7,821.7 ; D3.2@-139.95,829.26 cw(c-139.95,803.46) -121.7,821.7 ; D3.2@-139.95,829.26 cw(c-139.95,803.46) -121.7,821.7 ; D3.2@-139.95,829.26 cw(c-139.95,803.46) -121.7,821.7 ; D3.2@-129.26,839.95 ccw(c-103.46,839.95) -121.7,821.7 ; D3.2@-129.26,839.95 ccw(c-103.46,839.95) -121.7,821.7 ; D3.2@-129.26,839.95 ccw(c-103.46,839.95) -121.7,821.7 ; D3.2@-129.26,839.95 ccw(c-103.46,839.95) -121.7,821.7 ; D3.2@-123.26,839.95 ccw(c-82.98,839.95) -111.46,811.46 ; D3.2@-123.26,839.95 ccw(c-82.98,839.95) -111.46,811.46 ; D3.2@-123.26,839.95 ccw(c-82.98,839.95) -111.46,811.46 ; D3.2@-123.26,839.95 ccw(c-82.98,839.95) -111.46,811.46 ; -48.06,798.08 cw(c-69.82,776.32) U1.67@-39.05,776.32 ; -48.06,798.08 ccw(c-26.3,819.85) U1.67@-26.3,789.07 ; -48.06,798.08 cw(c-69.82,776.32) U1.67@-39.05,776.32 ; -48.06,798.08 ccw(c-26.3,819.85) U1.67@-26.3,789.07 ; -48.06,798.08 ccw(c-26.3,819.85) U1.67@-26.3,789.07 ; -48.06,798.08 cw(c-69.82,776.32) U1.67@-39.05,776.32 ; -48.06,798.08 ccw(c-26.3,819.85) U1.67@-26.3,789.07 ; -48.06,798.08 cw(c-69.82,776.32) U1.67@-39.05,776.32 ; -37.82,787.84 cw(c-49.34,776.32) U1.67@-33.05,776.32 ; -37.82,787.84 ccw(c-26.3,799.36) U1.67@-26.3,783.07 ; -37.82,787.84 cw(c-49.34,776.32) U1.67@-33.05,776.32 ; -37.82,787.84 ccw(c-26.3,799.36) U1.67@-26.3,783.07 ; -37.82,787.84 ccw(c-26.3,799.36) U1.67@-26.3,783.07 ; -37.82,787.84 cw(c-49.34,776.32) U1.67@-33.05,776.32 ; -37.82,787.84 ccw(c-26.3,799.36) U1.67@-26.3,783.07 ; -37.82,787.84 cw(c-49.34,776.32) U1.67@-33.05,776.32 ; U1.67@4.33,732.95 cw(c4.33,702.17) 26.09,723.94 ; U1.67@4.33,732.95 cw(c4.33,702.17) 26.09,723.94 ; U1.67@4.33,732.95 cw(c4.33,702.17) 26.09,723.94 ; U1.67@4.33,732.95 cw(c4.33,702.17) 26.09,723.94 ; U1.67@4.33,738.95 cw(c4.33,722.66) 15.84,734.18 ; U1.67@4.33,738.95 cw(c4.33,722.66) 15.84,734.18 ; U1.67@4.33,738.95 cw(c4.33,722.66) 15.84,734.18 ; U1.67@4.33,738.95 cw(c4.33,722.66) 15.84,734.18 ; U1.67@11.07,745.7 ccw(c27.36,745.7) 15.84,734.18 ; U1.67@11.07,745.7 ccw(c27.36,745.7) 15.84,734.18 ; U1.67@11.07,745.7 ccw(c27.36,745.7) 15.84,734.18 ; U1.67@11.07,745.7 ccw(c27.36,745.7) 15.84,734.18 ; U1.67@17.07,745.7 ccw(c47.85,745.7) 26.09,723.94 ; U1.67@17.07,745.7 ccw(c47.85,745.7) 26.09,723.94 ; U1.67@17.07,745.7 ccw(c47.85,745.7) 26.09,723.94 ; U1.67@17.07,745.7 ccw(c47.85,745.7) 26.09,723.94 ; 134.64,675.36 cw(c119.27,660) v1@141,660 ; 134.64,675.36 ccw(c150,690.73) v1@150,669 ; 134.64,675.36 cw(c119.27,660) v1@141,660 ; 134.64,675.36 ccw(c150,690.73) v1@150,669 ; 134.64,675.36 ccw(c150,690.73) v1@150,669 ; 134.64,675.36 cw(c119.27,660) v1@141,660 ; 134.64,675.36 ccw(c150,690.73) v1@150,669 ; 134.64,675.36 cw(c119.27,660) v1@141,660
  Bottom Layer w6: J2.57@109.8,-321.26 109.8,-244 ; v1(150,660) 203,607 203,-150.8 109.8,-244 ; J2.57@105.02,-255.34 ccw(c93.96,-244) 109.8,-244 ; J2.57@105.02,-255.34 ccw(c93.96,-244) 109.8,-244 ; J2.57@105.02,-255.34 ccw(c93.96,-244) 109.8,-244 ; J2.57@105.02,-255.34 ccw(c93.96,-244) 109.8,-244 ; 109.8,-244 ccw(c125.64,-244) J2.57@114.58,-255.34 ; 109.8,-244 ccw(c125.64,-244) J2.57@114.58,-255.34 ; 109.8,-244 ccw(c125.64,-244) J2.57@114.58,-255.34 ; 109.8,-244 ccw(c125.64,-244) J2.57@114.58,-255.34 ; v1@150,651 cw(c150,629.27) 165.36,644.64 ; v1@150,651 cw(c150,629.27) 165.36,644.64 ; v1@150,651 cw(c150,629.27) 165.36,644.64 ; v1@150,651 cw(c150,629.27) 165.36,644.64 ; v1@159,660 ccw(c180.73,660) 165.36,644.64 ; v1@159,660 ccw(c180.73,660) 165.36,644.64 ; v1@159,660 ccw(c180.73,660) 165.36,644.64 ; v1@159,660 ccw(c180.73,660) 165.36,644.64
MISO0: J2.41 U1.57 | length 2205.4
  Top Layer w6: U1.57@342.57,1114.56 386,1071.13 386,664 v1(390,660) ; U1.57@357.88,1086.5 cw(c357.88,1055.73) 379.64,1077.49 ; U1.57@357.88,1086.5 cw(c357.88,1055.73) 379.64,1077.49 ; U1.57@357.88,1086.5 cw(c357.88,1055.73) 379.64,1077.49 ; U1.57@357.88,1086.5 cw(c357.88,1055.73) 379.64,1077.49 ; U1.57@357.88,1092.5 cw(c357.88,1076.21) 369.4,1087.73 ; U1.57@357.88,1092.5 cw(c357.88,1076.21) 369.4,1087.73 ; U1.57@357.88,1092.5 cw(c357.88,1076.21) 369.4,1087.73 ; U1.57@357.88,1092.5 cw(c357.88,1076.21) 369.4,1087.73 ; U1.57@364.63,1099.25 ccw(c380.92,1099.25) 369.4,1087.73 ; U1.57@364.63,1099.25 ccw(c380.92,1099.25) 369.4,1087.73 ; U1.57@364.63,1099.25 ccw(c380.92,1099.25) 369.4,1087.73 ; U1.57@364.63,1099.25 ccw(c380.92,1099.25) 369.4,1087.73 ; U1.57@370.63,1099.25 ccw(c401.4,1099.25) 379.64,1077.49 ; U1.57@370.63,1099.25 ccw(c401.4,1099.25) 379.64,1077.49 ; U1.57@370.63,1099.25 ccw(c401.4,1099.25) 379.64,1077.49 ; U1.57@370.63,1099.25 ccw(c401.4,1099.25) 379.64,1077.49 ; v1@383.64,666.36 ccw(c377.93,672.07) 386,672.07 ; v1@383.64,666.36 ccw(c377.93,672.07) 386,672.07 ; v1@383.64,666.36 ccw(c377.93,672.07) 386,672.07 ; v1@383.64,666.36 ccw(c377.93,672.07) 386,672.07 ; 386,676.9 ccw(c406.9,676.9) v1@392.12,662.12 ; 386,676.9 ccw(c406.9,676.9) v1@392.12,662.12 ; 386,676.9 ccw(c406.9,676.9) v1@392.12,662.12 ; 386,676.9 ccw(c406.9,676.9) v1@392.12,662.12 ; 386,691.38 ccw(c421.38,691.38) v1@396.36,666.36 ; 386,691.38 ccw(c421.38,691.38) v1@396.36,666.36 ; 386,691.38 ccw(c421.38,691.38) v1@396.36,666.36 ; 386,691.38 ccw(c421.38,691.38) v1@396.36,666.36
  Bottom Layer w6: J2.41@361.77,-321.26 361.77,631.77 v1(390,660) ; J2.41@356.93,-255.4 ccw(c345.25,-243.72) 361.77,-243.72 ; J2.41@356.93,-255.4 ccw(c345.25,-243.72) 361.77,-243.72 ; J2.41@356.93,-255.4 ccw(c345.25,-243.72) 361.77,-243.72 ; J2.41@356.93,-255.4 ccw(c345.25,-243.72) 361.77,-243.72 ; 361.77,-243.72 ccw(c378.29,-243.72) J2.41@366.61,-255.4 ; 361.77,-243.72 ccw(c378.29,-243.72) J2.41@366.61,-255.4 ; 361.77,-243.72 ccw(c378.29,-243.72) J2.41@366.61,-255.4 ; 361.77,-243.72 ccw(c378.29,-243.72) J2.41@366.61,-255.4 ; 374.64,644.64 cw(c390,629.27) v1@390,651 ; 374.64,644.64 ccw(c359.27,660) v1@381,660 ; 374.64,644.64 cw(c390,629.27) v1@390,651 ; 374.64,644.64 ccw(c359.27,660) v1@381,660 ; 374.64,644.64 ccw(c359.27,660) v1@381,660 ; 374.64,644.64 cw(c390,629.27) v1@390,651 ; 374.64,644.64 ccw(c359.27,660) v1@381,660 ; 374.64,644.64 cw(c390,629.27) v1@390,651